# Allegro board upper_pcb.brd
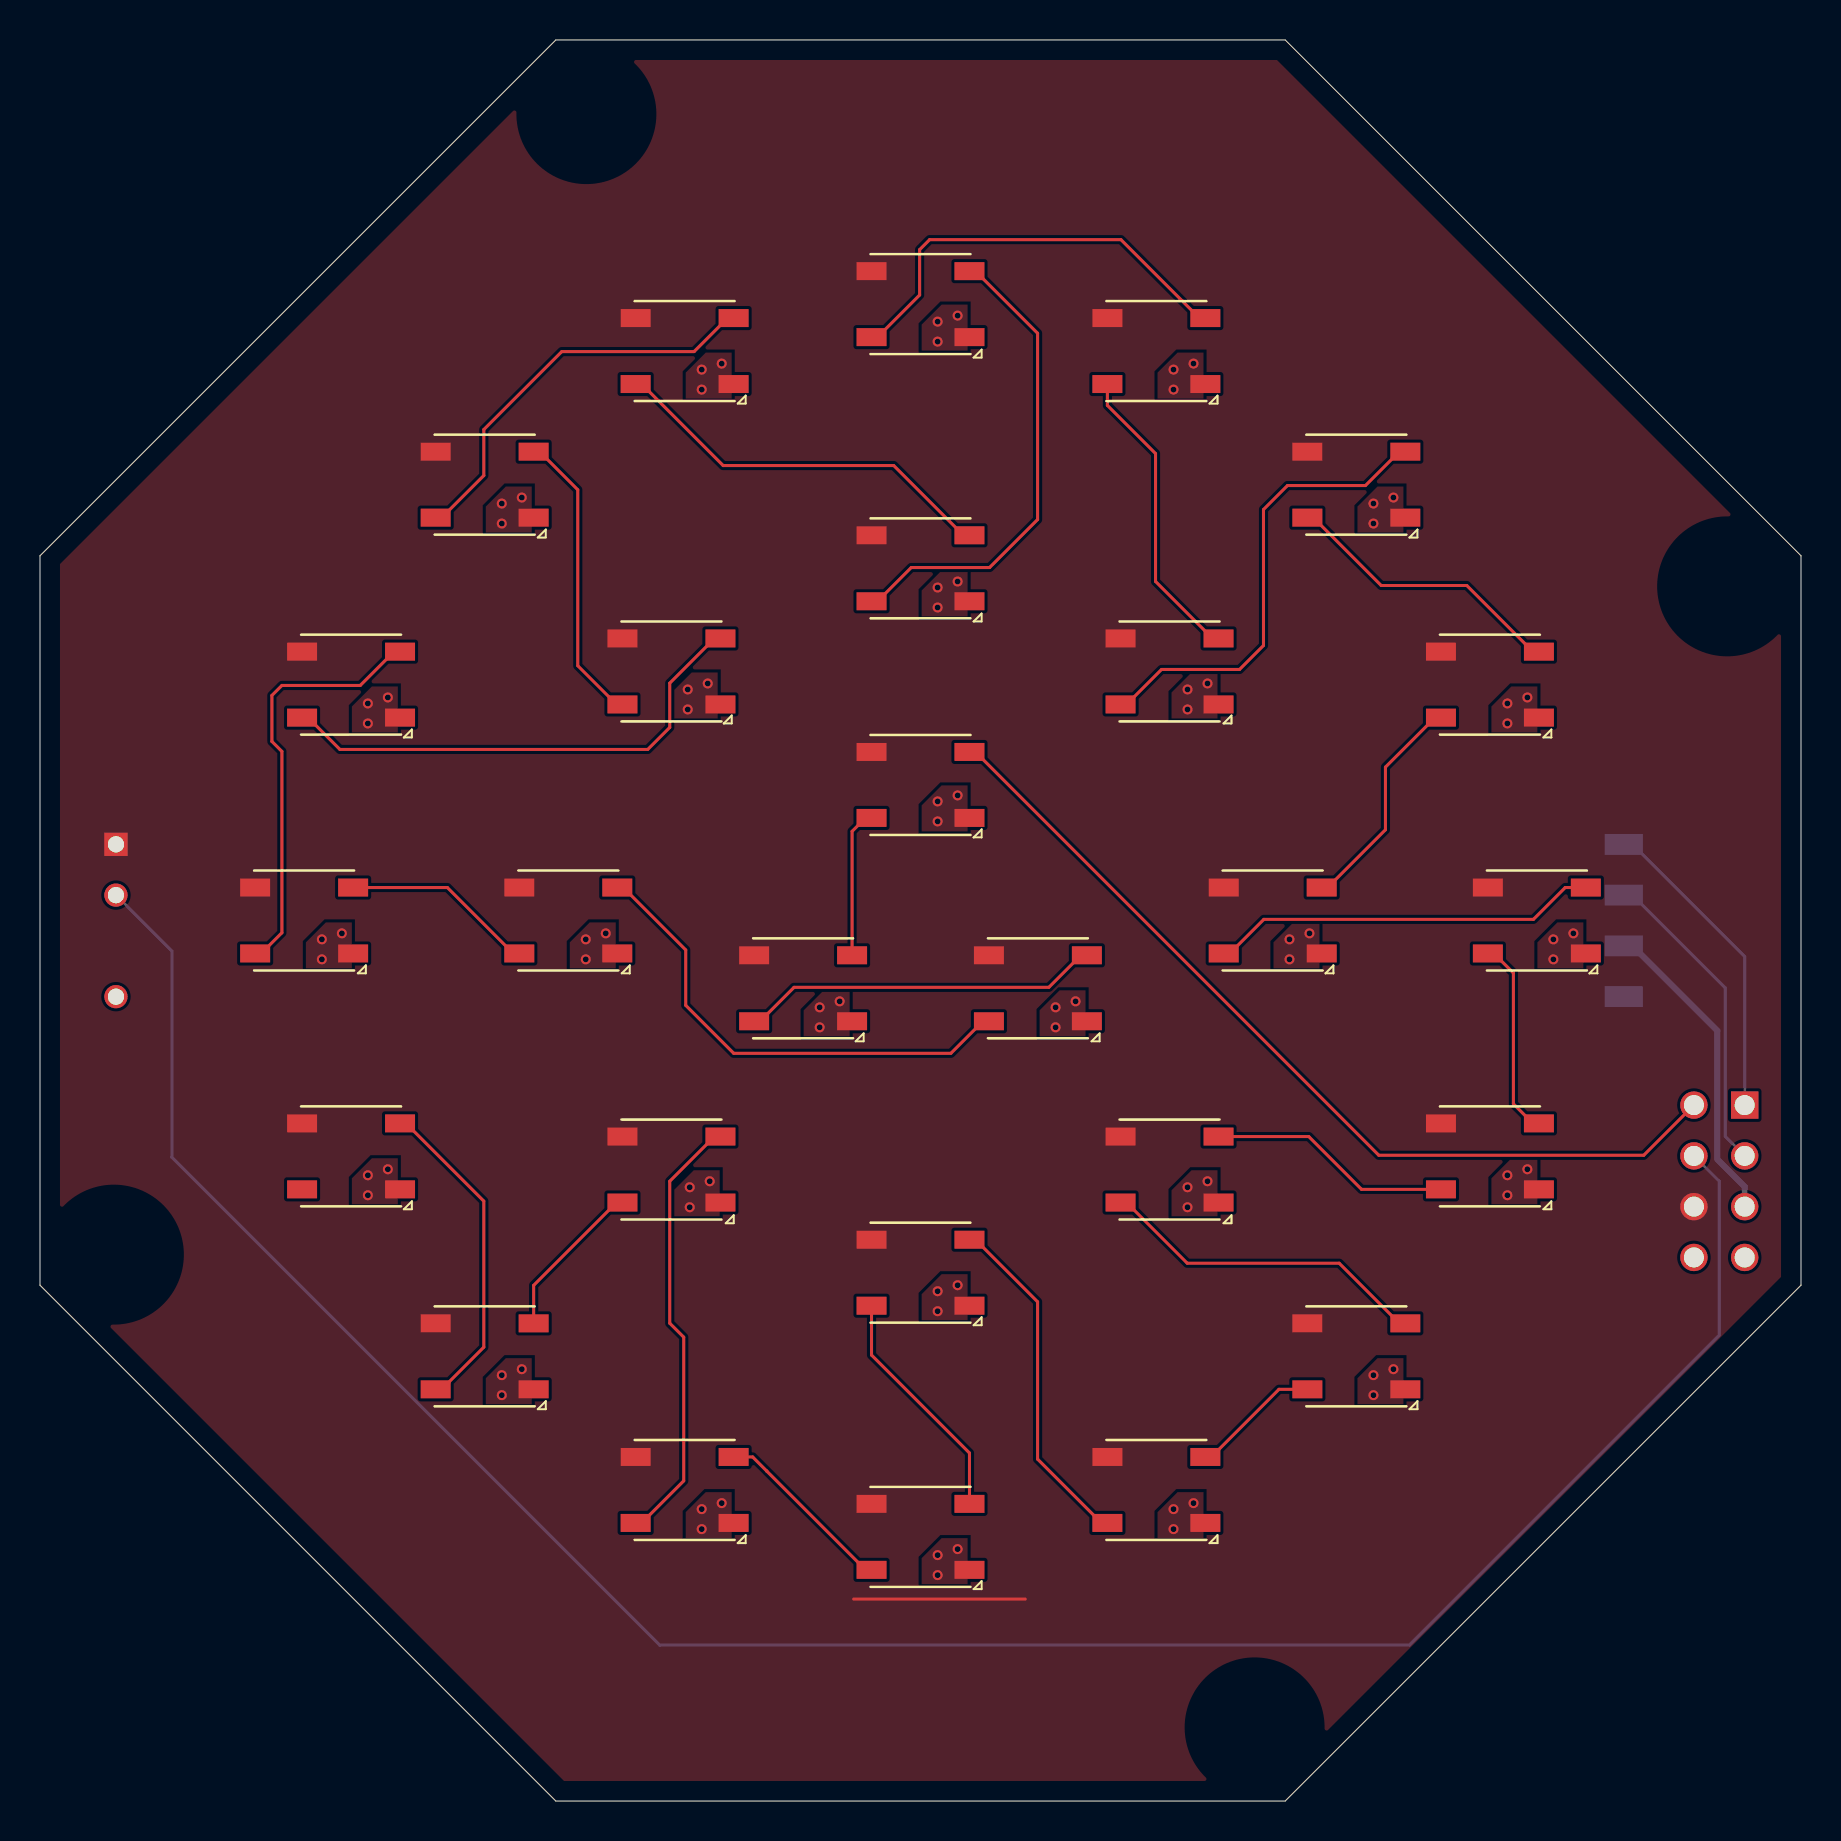
[diagram p0: board, top side]
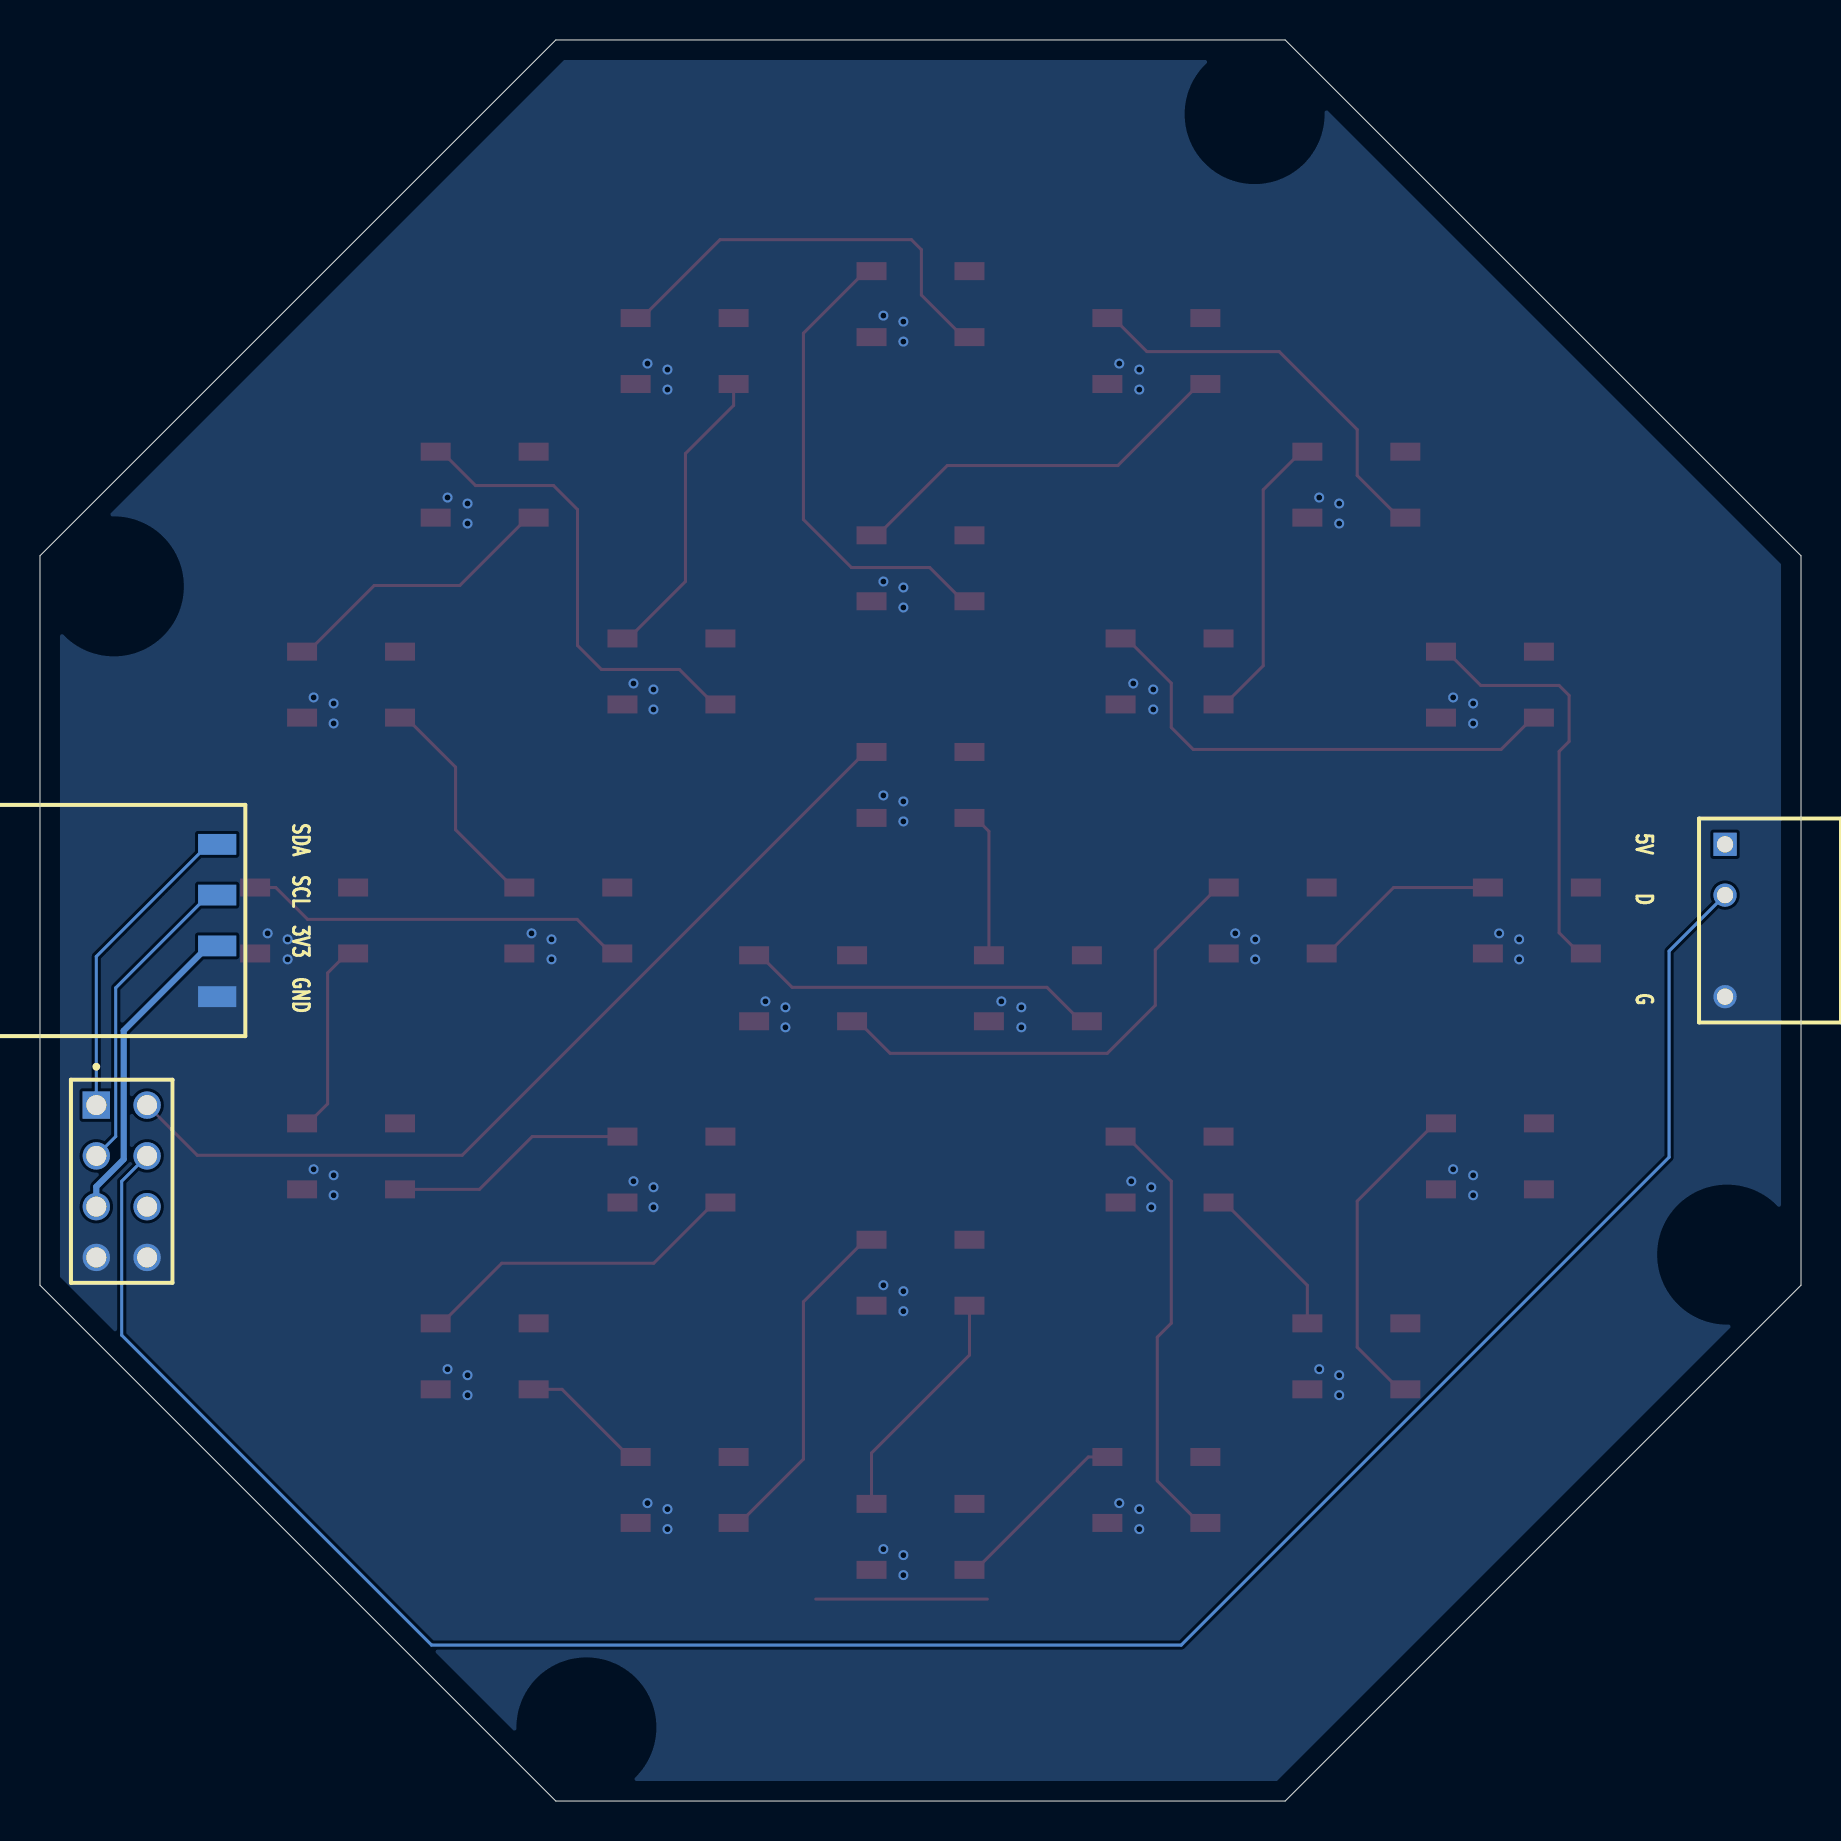
[diagram p1: board, bottom side, seen from below]

Outline 88.09 x 88.09 mm; copper layers: TOP, BOTTOM. Coordinates in mm from the lower left corner of the outline.
Outline path: 0,62.29 25.8,88.09 62.29,88.09 88.09,62.29 88.09,25.8 62.29,0 25.8,0 0,25.8 0,62.29

## Design rules (mm)
constraint set DEFAULT: min track width 0.127

## Placement (name value [footprint] x y rotation side)
J1  2*4P 2.54mm 21mm pins  [SAMTEC_BCS-104-T-D-TE]  84 31 90 top
J2  right angle 4P 2.54mm socket  [SAMTEC-SMH-104-02-X-S]  86.5 44.04 270 bottom
J3  ARGB socket  [ARGB_HEADER_90]  3.8 44.04 270 bottom
U1  WS2812B-B  [LED_WS2812B-B]  44.04 50.82 0 top
U2  WS2812B-B  [LED_WS2812B-B]  38.17 40.65 0 top
U3  WS2812B-B  [LED_WS2812B-B]  49.92 40.65 0 top
U4  WS2812B-B  [LED_WS2812B-B]  26.43 44.04 0 top
U5  WS2812B-B  [LED_WS2812B-B]  13.21 44.04 0 top
U6  WS2812B-B  [LED_WS2812B-B]  15.56 55.84 0 top
U7  WS2812B-B  [LED_WS2812B-B]  31.59 56.5 0 top
U8  WS2812B-B  [LED_WS2812B-B]  22.24 65.84 0 top
U9  WS2812B-B  [LED_WS2812B-B]  32.25 72.53 0 top
U10  WS2812B-B  [LED_WS2812B-B]  44.04 61.66 0 top
U11  WS2812B-B  [LED_WS2812B-B]  44.04 74.87 0 top
U12  WS2812B-B  [LED_WS2812B-B]  55.84 72.53 0 top
U13  WS2812B-B  [LED_WS2812B-B]  56.5 56.5 0 top
U14  WS2812B-B  [LED_WS2812B-B]  65.84 65.84 0 top
U15  WS2812B-B  [LED_WS2812B-B]  72.53 55.84 0 top
U16  WS2812B-B  [LED_WS2812B-B]  61.66 44.04 0 top
U17  WS2812B-B  [LED_WS2812B-B]  74.87 44.04 0 top
U18  WS2812B-B  [LED_WS2812B-B]  72.53 32.25 0 top
U19  WS2812B-B  [LED_WS2812B-B]  56.5 31.59 0 top
U20  WS2812B-B  [LED_WS2812B-B]  65.84 22.24 0 top
U21  WS2812B-B  [LED_WS2812B-B]  55.84 15.56 0 top
U22  WS2812B-B  [LED_WS2812B-B]  44.04 26.43 0 top
U23  WS2812B-B  [LED_WS2812B-B]  44.04 13.21 0 top
U24  WS2812B-B  [LED_WS2812B-B]  32.25 15.56 0 top
U25  WS2812B-B  [LED_WS2812B-B]  31.59 31.59 0 top
U26  WS2812B-B  [LED_WS2812B-B]  22.24 22.24 0 top
U27  WS2812B-B  [LED_WS2812B-B]  15.56 32.25 0 top

## Library data of the parts
J1 = BCS-104-T-D-TE_4
J2 = SAMTEC-SMH-104-02-X-SA_0
J3 = SAMTEC-SMH-104-02-X-SA_2
U1-U27 = WS2812B-B_1

## Footprints (pads in the part's own frame, mm; a bottom-side part is the same pattern mirrored in y, then rotated)
ARGB_HEADER_90
  rect 1.163x1.163 hole 0.813: 1(-3.81,0)
  round 1.163 hole 0.813: 2(-1.27,0) 3(3.81,0)
LED_WS2812B-B
  rect 1.5x0.9 smd: 1(-2.45,1.65) 2(-2.45,-1.65) 3(2.45,-1.65) 4(2.45,1.65)
SAMTEC-SMH-104-02-X-S
  rect 1.04x1.91 smd: 1(-3.81,7.277) 2(-1.27,7.277) 3(1.27,7.277) 4(3.81,7.277)
SAMTEC_BCS-104-T-D-TE
  rect 1.37x1.37 hole 1: 01(3.81,-1.27)
  round 1.37 hole 1: 02(3.81,1.27) 03(1.27,-1.27) 04(1.27,1.27) 05(-1.27,-1.27) 06(-1.27,1.27) 07(-3.81,-1.27) 08(-3.81,1.27)

## Nets
GND: J1.07 J1.08 J2.4 J3.3(GND) U1.3(VSS) U2.3(VSS) U3.3(VSS) U4.3(VSS) U5.3(VSS) U6.3(VSS) U7.3(VSS) U8.3(VSS) U9.3(VSS) U10.3(VSS) U11.3(VSS) U12.3(VSS) U13.3(VSS) U14.3(VSS) U15.3(VSS) U16.3(VSS) U17.3(VSS) U18.3(VSS) U19.3(VSS) U20.3(VSS) U21.3(VSS) U22.3(VSS) U23.3(VSS) U24.3(VSS) U25.3(VSS) U26.3(VSS) U27.3(VSS)
N00237: U1.2 U2.4
N00249: J1.06(VDD) J3.1 U1.1 U2.1 U3.1 U4.1 U5.1 U6.1 U7.1 U8.1 U9.1 U10.1 U11.1 U12.1 U13.1 U14.1 U15.1 U16.1 U17.1 U18.1 U19.1 U20.1 U21.1 U22.1 U23.1 U24.1 U25.1 U26.1 U27.1
N00681: U2.2 U3.4
N01093: U3.2 U4.4
N01106: U4.2 U5.4
N01423: U6.2 U7.4
N01435: U7.2 U8.4
N01455: U8.2 U9.4
N01467: U9.2 U10.4
N01479: U5.2 U6.4
N02675: U11.2 U12.4
N02687: U12.2 U13.4
N02699: U13.2 U14.4
N02711: U14.2 U15.4
N02794: U10.2 U11.4
N03689: U15.2 U16.4
N03774: U16.2 U17.4
N04415: J1.02 U1.4
N05124: J1.01 J2.1
N05128: J1.03 J2.2
N05132: J1.05 J2.3(VDD)
N06617: U21.2 U22.4
N06791: U17.2 U18.4
N07022: U18.2 U19.4
N07034: U19.2 U20.4
N07046: U20.2 U21.4
N07095: U22.2 U23.4
N07107: U23.2 U24.4
N07119: U24.2 U25.4
N07131: U25.2 U26.4
N07156: U26.2 U27.4
N13763: J1.04 J3.2

Pads without a net: U27 2

## Via types
v1: diameter 0.5, hole 0.3, TOP to BOTTOM, 81 vias

## Routing (per net, layer and track width the routed paths; a pad name or vN(x,y) marks a point on that pad's centre or on a via; arc(x,y) is an arc through that point)
GND: length 0.3
  TOP w0.152: U1.3 46.19,49.17
  vias: v1(14.1,43.1) v1(14.1,42.1) v1(15.1,43.4) v1(16.4,54.9) v1(16.4,53.9) v1(16.4,31.3) v1(16.4,30.3) v1(17.4,55.2) v1(17.4,31.6) v1(23.1,64.9) v1(23.1,63.9) v1(23.1,21.3) v1(23.1,20.3) v1(24.1,65.2) v1(24.1,21.6) v1(27.3,43.1) v1(27.3,42.1) v1(28.3,43.4) v1(32.4,55.6) v1(32.4,54.6) v1(32.5,30.7) v1(32.5,29.7) v1(33.1,71.6) v1(33.1,70.6) v1(33.1,14.6) v1(33.1,13.6) v1(33.4,55.9) v1(33.5,31) v1(34.1,71.9) v1(34.1,14.9) v1(39,39.7) v1(39,38.7) v1(40,40) v1(44.9,74) v1(44.9,73) v1(44.9,60.7) v1(44.9,59.7) v1(44.9,50) v1(44.9,49) v1(44.9,25.5) v1(44.9,24.5) v1(44.9,12.3) v1(44.9,11.3) v1(45.9,74.3) v1(45.9,61) v1(45.9,50.3) v1(45.9,25.8) v1(45.9,12.6) v1(50.8,39.7) v1(50.8,38.7) v1(51.8,40) v1(56.7,71.6) v1(56.7,70.6) v1(56.7,14.6) v1(56.7,13.6) v1(57.4,55.6) v1(57.4,54.6) v1(57.4,30.7) v1(57.4,29.7) v1(57.7,71.9) v1(57.7,14.9) v1(58.4,55.9) v1(58.4,31) v1(62.5,43.1) v1(62.5,42.1) v1(63.5,43.4) v1(66.7,64.9) v1(66.7,63.9) v1(66.7,21.3) v1(66.7,20.3) v1(67.7,65.2) v1(67.7,21.6) v1(73.4,54.9) v1(73.4,53.9) v1(73.4,31.3) v1(73.4,30.3) v1(74.4,55.2) v1(74.4,31.6) v1(75.7,43.1) v1(75.7,42.1) v1(76.7,43.4)
N00237: length 7.5
  TOP w0.152: U1.2 41.29,49.17 40.62,48.5 U2.4
N00249: length 8.6
  TOP w0.152: 40.7,10.1 49.28,10.1
N00681: length 18
  TOP w0.152: U2.2 36.02,39 37.72,40.7 50.46,40.7 52.07,42.3 U3.4
N01093: length 24.3
  TOP w0.152: U3.2 47.17,39 45.56,37.4 34.7,37.4 32.3,39.8 32.3,42.57 29.18,45.69 U4.4
N01106: length 9.7
  TOP w0.152: U5.4 20.38,45.69 23.68,42.39 U4.2
N01423: length 25.2
  TOP w0.152: U6.2 13.41,54.19 15,52.6 30.4,52.6 31.5,53.7 31.5,55.91 33.74,58.15 U7.4
N01435: length 14.8
  TOP w0.152: U8.4 24.99,67.49 26.9,65.59 26.9,56.79 28.84,54.85 U7.2
N01455: length 20.4
  TOP w0.152: U9.4 34.4,74.18 32.72,72.5 26.1,72.5 22.2,68.6 22.2,66.3 20.09,64.19 U8.2
N01467: length 19.8
  TOP w0.152: U10.4 46.19,63.31 42.7,66.8 34.17,66.8 30.1,70.88 U9.2
N01479: length 21.2
  TOP w0.152: U6.4 17.71,57.49 16.02,55.8 12.1,55.8 11.6,55.3 11.6,53 12.1,52.5 12.1,43.43 11.06,42.39 10.76,42.39
N02675: length 21.7
  TOP w0.152: U11.2 41.89,73.22 44,75.33 44,77.6 44.5,78.1 54.07,78.1 57.99,74.18 U12.4
N02687: length 15.2
  TOP w0.152: U13.4 58.65,58.15 55.8,61 55.8,67.4 53.39,69.81 U12.2
N02699: length 23.5
  TOP w0.152: U14.4 67.99,67.49 66.3,65.8 62.4,65.8 61.2,64.6 61.2,57.8 60,56.6 56.1,56.6 54.35,54.85 U13.2
N02711: length 14.4
  TOP w0.152: U14.2 63.69,64.19 67.09,60.8 71.37,60.8 74.68,57.49 U15.4
N02794: length 24
  TOP w0.152: U10.2 41.89,60.01 43.58,61.7 47.5,61.7 49.9,64.1 49.9,73.42 46.79,76.52 U11.4
N03689: length 11.3
  TOP w0.152: U16.4 64.41,45.69 67.3,48.58 67.3,51.71 69.78,54.19 U15.2
N03774: length 19.5
  TOP w0.152: U17.4 76.29,45.69 74.7,44.1 61.22,44.1 59.51,42.39 U16.2
N04415: length 45.6
  TOP w0.152: U1.4 46.79,52.47 66.97,32.3 80.22,32.3 J1.02
N05124: length 15.8
  BOTTOM w0.152: J2.1 79.66,47.85 85.27,42.24 J1.01
N05128: length 15.8
  BOTTOM w0.152: J1.03 84.3,33.24 84.3,40.67 79.66,45.31 J2.2
N05132: length 15.8
  BOTTOM w0.305: J2.3 79.66,42.77 83.9,38.53 83.9,32.1 85.27,30.73 J1.05
N06617: length 17.4
  TOP w0.152: U21.2 53.09,13.91 49.9,17.1 49.9,24.97 46.79,28.08 U22.4
N06791: length 9.9
  TOP w0.152: U17.2 72.72,42.39 73.7,41.42 73.7,34.87 74.68,33.9 U18.4
N07022: length 12.2
  TOP w0.152: U19.4 63.46,33.24 66.1,30.6 U18.2
N07034: length 16.7
  TOP w0.152: U19.2 54.35,29.94 57.39,26.9 64.99,26.9 67.99,23.89 U20.4
N07046: length 6.5
  TOP w0.152: U21.4 58.59,17.21 61.98,20.59 U20.2
N07095: length 11.9
  TOP w0.152: U22.2 41.59,22.31 46.49,17.41 U23.4
N07107: length 9.2
  TOP w0.152: 41.59,11.56 41.29,11.56 36.36,16.5 36.36,16.5 35.65,17.21 U24.4
N07119: length 22
  TOP w0.152: U25.4 33.74,33.24 31.5,31 31.5,23.9 32.2,23.2 32.2,16.01 30.1,13.91 U24.2
N07131: length 8.1
  TOP w0.152: U26.4 24.69,25.79 28.84,29.94 U25.2
N07156: length 16.4
  TOP w0.152: U26.2 20.09,20.59 22.2,22.7 22.2,30.01 18.31,33.9 U27.4
N13763: length 117.7
  BOTTOM w0.152: J1.04 84,31 84,23.3 68.5,7.8 31,7.8 6.6,32.2 6.6,42.51 J3.2

## Copper pours and planes (outline as drawn; the poured copper is in the pictures)
GND on TOP: 74.9,42.95 75.9,43.95 77.2,43.95 77.2,41.65 74.9,41.65
GND on TOP: 55.9,14.45 56.9,15.45 58.2,15.45 58.2,13.15 55.9,13.15
GND on TOP: 26.5,42.95 27.5,43.95 28.8,43.95 28.8,41.65 26.5,41.65
GND on TOP: 22.3,21.15 23.3,22.15 24.6,22.15 24.6,19.85 22.3,19.85
GND on TOP: 38.2,39.55 39.2,40.55 40.5,40.55 40.5,38.25 38.2,38.25
GND on TOP: 56.6,30.55 57.6,31.55 58.9,31.55 58.9,29.25 56.6,29.25
GND on TOP: 44.1,12.15 45.1,13.15 46.4,13.15 46.4,10.85 44.1,10.85
GND on TOP: 44.1,25.35 45.1,26.35 46.4,26.35 46.4,24.05 44.1,24.05
GND on TOP: 55.9,71.45 56.9,72.45 58.2,72.45 58.2,70.15 55.9,70.15
GND on TOP: 15.6,54.75 16.6,55.75 17.9,55.75 17.9,53.45 15.6,53.45
GND on TOP: 50,39.55 51,40.55 52.3,40.55 52.3,38.25 50,38.25
GND on TOP: 32.3,14.45 33.3,15.45 34.6,15.45 34.6,13.15 32.3,13.15
GND on TOP: 13.3,42.95 14.3,43.95 15.6,43.95 15.6,41.65 13.3,41.65
GND on TOP: 65.9,21.15 66.9,22.15 68.2,22.15 68.2,19.85 65.9,19.85
GND on TOP: 44.1,49.8 45.1,50.8 46.4,50.8 46.4,48.5 44.1,48.5
GND on TOP: 72.6,54.75 73.6,55.75 74.9,55.75 74.9,53.45 72.6,53.45
GND on TOP: 15.6,31.15 16.6,32.15 17.9,32.15 17.9,29.85 15.6,29.85
GND on TOP: 22.3,64.75 23.3,65.75 24.6,65.75 24.6,63.45 22.3,63.45
GND on TOP: 44.1,73.85 45.1,74.85 46.4,74.85 46.4,72.55 44.1,72.55
GND on TOP: 32.3,71.45 33.3,72.45 34.6,72.45 34.6,70.15 32.3,70.15
GND on TOP: 61.7,42.95 62.7,43.95 64,43.95 64,41.65 61.7,41.65
GND on TOP: 44.1,60.55 45.1,61.55 46.4,61.55 46.4,59.25 44.1,59.25
GND on TOP: 31.7,30.55 32.7,31.55 34,31.55 34,29.25 31.7,29.25
GND on TOP: 31.6,55.45 32.6,56.45 33.9,56.45 33.9,54.15 31.6,54.15
GND on TOP: 56.6,55.45 57.6,56.45 58.9,56.45 58.9,54.15 56.6,54.15
GND on TOP: 72.6,31.15 73.6,32.15 74.9,32.15 74.9,29.85 72.6,29.85
GND on TOP: 65.9,64.75 66.9,65.75 68.2,65.75 68.2,63.45 65.9,63.45
GND on BOTTOM: 26.21,1 1,26.21 1,61.87 26.21,87.09 61.87,87.09 87.09,61.87 87.09,26.21 61.87,1
N00249 on TOP: 26.21,1 1,26.21 1,61.87 26.21,87.09 61.87,87.09 87.09,61.87 87.09,26.21 61.87,1

## Text on the board
Ref Des/Silkscreen Bottom: 5V | D | G | SDA | SCL | 3V3 | GND
